# Altium PCB Cycle8 DB.pcbdoc
Units mil, origin at the board's own origin, x right, y up, seen from the top; angles counter-clockwise.
Board outline 1031.65 x 819.43 mil, 2 copper layers (Top Layer, Bottom Layer); 10 components, 10 nets, 70 pads, 34 vias.
Unrouted connection lines stored in the file: 19.
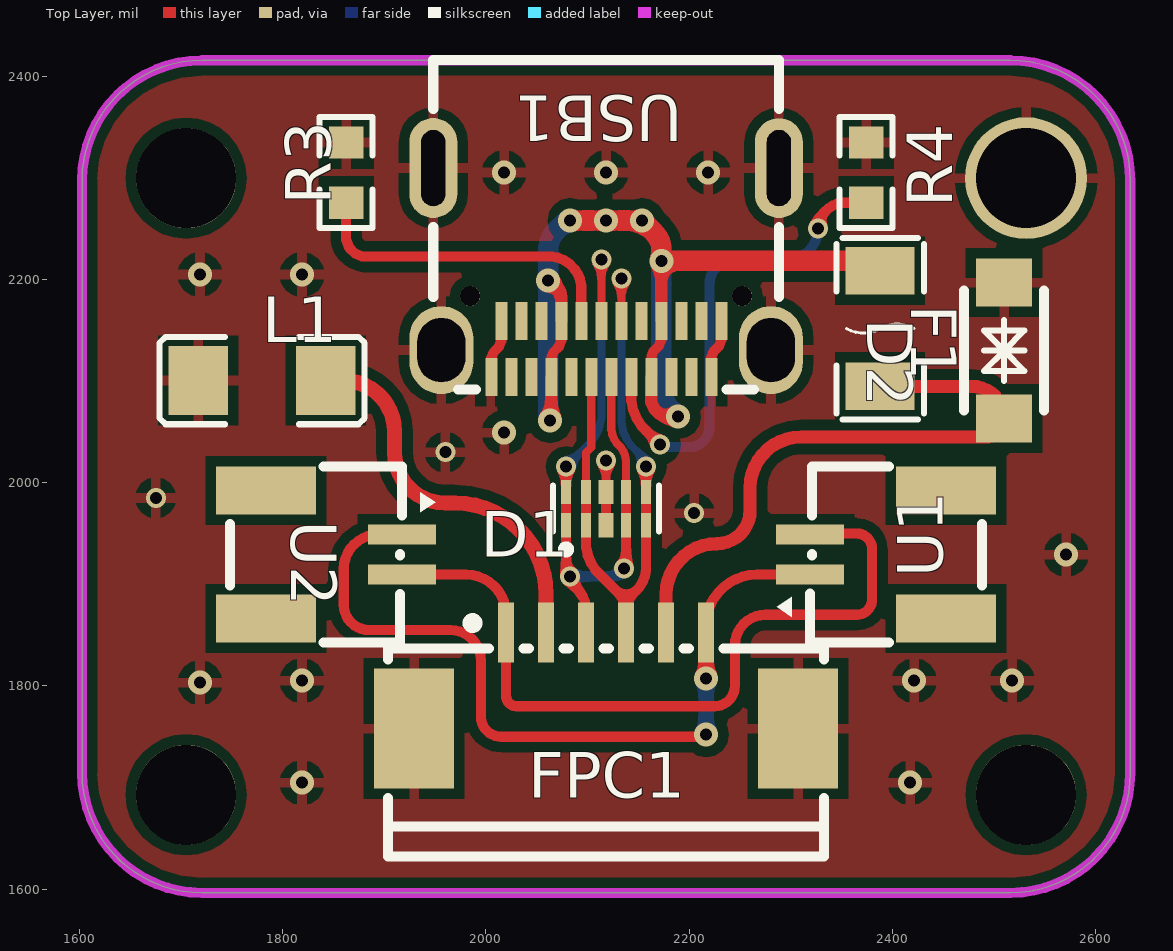
[diagram p0: Top Layer view]
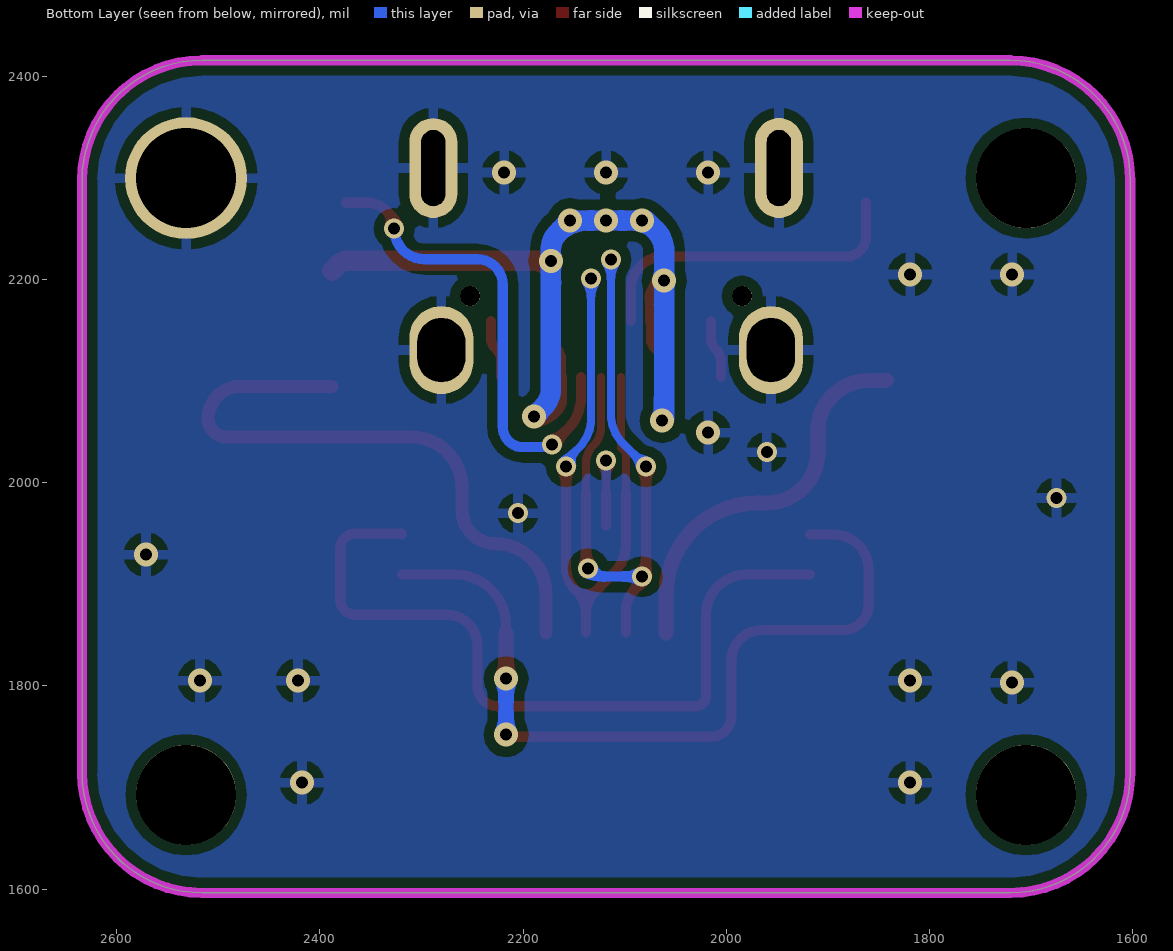
[diagram p1: Bottom Layer view, seen from below]

## Layer stack, top to bottom
Top Solder: solder mask 0.4, Solder Resist, Dk 3.5
Top Layer: signal copper 1.4
Dielectric1: dielectric 12.6, FR-4, Dk 4.8
Bottom Layer: signal copper 1.4
Bottom Solder: solder mask 0.4, Solder Resist, Dk 3.5

## Board outline
1602.44,1714.43 ccw(c1720.55,1714.43) 1720.55,1596.32 2515.98,1596.32 ccw(c2515.98,1714.43) 2634.09,1714.43 2634.09,2297.64 ccw(c2515.98,2297.64) 2515.98,2415.74 1720.55,2415.74 ccw(c1720.55,2297.64) 1602.44,2297.64

## Design rules (kind name [scope] priority, off if disabled: settings)
Clearance [All] p1: gap=10 ignorepadtopadclearanceinfootprint=FALSE except(0: Arc-Hole Track-Hole SMDPad-Hole THPad-Hole Via-Hole Fill-Hole Poly-Hole Region-Hole Text-Hole)
PolygonConnect [All] p1: connectstyle=Relief reliefconductorwidth=10 reliefentries=4 polygonreliefangle="90 Angle" airgapwidth=10
RoutingVias [All] p1: holewidth=28 width=50 viastyle="Through Hole" minholewidth=28 minwidth=50 maxholewidth=28 maxwidth=50
SolderMaskExpansion [All] p1: expansion=4 istentingtop=FALSE
Width [All] p1: maxlimit=10 minlimit=10 preferedwidth=10
30 further rules are at their usual default settings.

## Components (designator, comment, footprint, x,y, rotation, side; value= is the part's Value field where it differs from the comment)
D1 "TPD4E05U06DQAR_C138714" USON-10_L2.5-W1.0-P0.50-BL 2118.27,1974.53 r0 top
D2 "SMF9.0CA_C123799" SOD-123FL_L2.8-W1.8-LS3.7-BI 2510,2130 r270 top
F1 "ASMD1206-150" F1206 2388.02,2151.74 r270 top
FPC1 "FPC1.0-2H-WS-6P" FPC-SMD_6P-P1.00_FPC1.0-2H-WS 2118.27,1805.19 r0 top locked
L1 "60Ω" L1206 1779.6,2100.55 r0 top
R3 "5.1K" R0603 1862.36,2305.24 r90 top
R4 "5.1K" R0603 2374.17,2305.24 r90 top
U1 "WAFER-SH1.0-2PWB" CONN-SMD_2P-P1.00_XUNPU_WAFER-SH1.0-2PWB 2385.98,1929.26 r90 top
U2 "WAFER-SH1.0-2PWB" CONN-SMD_2P-P1.00_XUNPU_WAFER-SH1.0-2PWB 1850.55,1929.26 r270 top
USB1 "TYPEC-324G-BCP24" USB-C-SMD_TYPEC-324G-BCP24 2118.27,2206.87 r180 top

## Footprints (in the part's own frame and the unit in brackets; to place one, negate y for a bottom-side part, rotate by r counter-clockwise, add the part's x,y. Pads: shape width x height; smd on the part's side, far side on the other; paste and mask are expansions set on the pad)
CONN-SMD_2P-P1.00_XUNPU_WAFER-SH1.0-2PWB [mm]
  rect 0.5x1.7 smd: 1(-0.5,1.7) 2(0.5,1.7)
  rect 1.2x2.5 smd: 3(1.6,-1.7) 4(-1.6,-1.7)
  silkscreen extent -2.2,-2.6 2.2,2.54
F1206 [mil]
  rect 46.85x68.03 smd: 1(-56.89,0) 2(56.89,0)
  silkscreen extent -89,-43 89,43
FPC-SMD_6P-P1.00_FPC1.0-2H-WS [mm]
  rect 0.4x1.5 smd: 1(-2.5,1.199) 2(-1.5,1.199) 3(-0.5,1.199) 4(0.5,1.199) 5(1.5,1.199) 6(2.5,1.199)
  rect 2x3 smd: 7(4.8,-1.199) 8(-4.8,-1.199)
  silkscreen extent -5.45,-4.4 5.45,1.56
L1206 [mm]
  rect 1.485x1.728 smd: 1(-1.593,0) 2(1.593,0)
  silkscreen extent -2.56,-1.09 2.56,1.09
R0603 [mil]
  rect 31.75x34.02 smd: 1(-29.65,0) 2(29.66,0)
  silkscreen extent -55,-26 55,26
SOD-123FL_L2.8-W1.8-LS3.7-BI [mm]
  rect 1.2x1.4 smd: 1(-1.7,0) 2(1.7,0)
  silkscreen extent -1.5,-1 1.5,1
USB-C-SMD_TYPEC-324G-BCP24 [mm]
  oval 1.6x2.2 hole 1.2 slot 1.6 at 90 deg: 1(-4.12,1.937) 2(4.12,1.938)
  oval 1.2x2.5 hole 0.6 slot 1.9 at 90 deg: 3(-4.32,-2.612) 4(4.32,-2.613)
  rect 0.3x0.95 smd: A1(-2.63,2.612) A2(-2.13,2.612) A3(-1.63,2.612) A4(-1.13,2.612) A5(-0.63,2.612) A6(-0.13,2.612) A7(0.37,2.612) A8(0.87,2.612) A9(1.37,2.612) A10(1.87,2.612) A11(2.37,2.612) A12(2.87,2.612) B1(2.62,1.212) B2(2.12,1.213) B3(1.62,1.213) B4(1.12,1.213) B5(0.62,1.213) B6(0.12,1.213) B7(-0.38,1.213) B8(-0.88,1.213) B9(-1.38,1.213) B10(-1.88,1.213) B11(-2.38,1.213) B12(-2.88,1.213)
  round 0.5 hole 0.5 unplated: ""(-3.4,0.587) ""(3.4,0.587)
  silkscreen extent -4.32,-5.31 4.32,2.92
USON-10_L2.5-W1.0-P0.50-BL [mm]
  rect 0.25x0.609 smd: 1(-1,-0.415) 2(-0.5,-0.415) 4(0.5,-0.415) 5(1,-0.415) 6(1,0.415) 7(0.5,0.415) 9(-0.5,0.415) 10(-1,0.415)
  rect 0.38x0.609 smd: 3(0,-0.415) 8(0,0.414)
  silkscreen extent -1.33,-1.12 1.33,0.58

## Free pads (board coordinates)
  round 98.43 hole 98.43 unplated: ""(1704.89,1692.87) ""(1704.89,2299.74) ""(2531.65,1692.87)
  round 120 hole 98.43 unplated: ""(2531.65,2299.74)

## Via types
v1: diameter 23.62, hole 11.81, Top Layer to Bottom Layer, 22 vias
v2: diameter 19.69, hole 11.81, Top Layer to Bottom Layer, 12 vias

## Nets (pads, with @x,y where several pads share a name; then routed paths per layer and width w, separated by ;. In a path a pad name is that pad's centre, name@x,y a point inside that pad or via, vN(x,y) a via of type N, cw(c..) or ccw(c..) an arc to the next point about the centre after c; other vN are vias at no path point)
+5V: D2.2 F1.2 FPC1.5 | length 618.8
  Top Layer w13: FPC1.5 2177.32,1890 cw(c2227.32,1890) 2227.32,1940 ccw(c2227.32,1972.68) 2260,1972.68 2260,1995 cw(c2310,1995) 2310,2045 2491.93,2045 ccw(c2491.93,2063.07) D2.2 ccw(c2478.22,2063.07) 2478.22,2094.85 F1.2
B+: FPC1.6 U1.1 U2.1 | length 806
  Top Layer w10: U2.1 1893.94,1948.94 ccw(c1893.94,1915) 1860,1915 1860,1880 ccw(c1885,1880) 1885,1855 1965,1855 cw(c1965,1825) 1995,1825 1995,1770 ccw(c2015,1770) 2015,1750 2214.68,1750 ccw(c2214.68,1752.03) v1(2216.72,1752.03) ; FPC1.6 2216.72,1859.58 cw(c2266.72,1859.58) 2266.72,1909.58 U1.1
  Top Layer w15: v1(2216.72,1807.16) FPC1.6
  Bottom Layer w15: v1(2216.72,1752.03) v1(2216.72,1807.16)
B-: FPC1.1 U1.2 U2.2 | length 768
  Top Layer w10: U2.2 1980.43,1909.57 cw(c1980.43,1870.16) 2019.84,1870.16 FPC1.1 2019.84,1790.16 ccw(c2030,1790.16) 2030,1780 2225,1780 ccw(c2225,1800) 2245,1800 2245,1840 cw(c2275,1840) 2275,1870 2365,1870 ccw(c2365,1885) 2380,1885 2380,1935 ccw(c2365,1935) 2365,1950 2320.1,1950 ccw(c2320.1,1948.95) U1.2
D+: D1.1 D1.4 D1.7 D1.10 FPC1.3 USB1.A6 USB1.B6 | length 696.8
  Top Layer w8: USB1.B6 v2(2113.54,2219.58) ; USB1.A6 2123.37,2052.1 2124.32,2047.29 2126.2,2042.75 2128.93,2038.67 2132.4,2035.2 2135.13,2031.12 2137.01,2026.58 2137.97,2021.76 D1.7@2137.97,1991.85
  Top Layer w10: v2(2078.89,2015.87) 2078.9,1990.85 D1.1 2078.9,1911.51 v2(2082.83,1907.58) 2082.83,1901.67 2092.57,1891.93 2095.51,1887.53 2097.53,1882.64 2098.57,1877.45 FPC1.3 ; v2@2135.97,1915.43 2137.97,1915.43 D1.4 ; D1.4 D1.7@2137.96,1990.85
  Bottom Layer w8: v2(2078.89,2015.87) 2104.2,2041.19 2108.78,2048.04 2111.93,2055.65 2113.54,2063.72 v2(2113.54,2219.58)
  Bottom Layer w10: v2@2082.87,1907.63 2125.18,1907.63 2130.12,1909.66 v2@2135.97,1915.43
  other v2: 2135.99,1915.46
D-: D1.2 D1.5 D1.6 D1.9 FPC1.4 USB1.A7 USB1.B7 | length 711.5
  Top Layer w8: D1.9@2098.57,1991.85 2098.57,2029.63 2103.67,2034.73 USB1.A7 ; USB1.B7 v2(2133.24,2201.06)
  Top Layer w10: D1.2@2098.57,1958.73 2098.57,1936.82 2100.21,1928.57 2103.43,1920.79 2108.11,1913.79 2137.97,1883.93 ; D1.2 D1.9@2098.59,1990.85 ; 2127.36,1894.54 ccw(c2137.97,1905.15) 2148.57,1894.54 ; 2129.43,1892.47 cw(c2108.82,1871.86) 2137.97,1871.86 cw(c2167.11,1871.86) 2146.5,1892.47 ; FPC1.4 2137.97,1883.93 ; D1.5 2157.64,1990.85 v2(2157.65,2015.87) ; D1.5@2157.67,1958.23 2157.67,1914.25 2156.37,1907.75 2153.84,1901.63 2150.16,1896.12 2137.97,1883.93
  Bottom Layer w8: v2(2133.24,2201.06) 2133.24,2059.35 2134.84,2051.3 2137.98,2043.72 2142.54,2036.89 2157.65,2021.79 v2(2157.65,2015.87)
GND: D1.3 D1.8 D2.1 FPC1.7 FPC1.8 L1.1 pad.@2531.65,2299.74 R3.2 R4.2 USB1.1 USB1.2 USB1.3 USB1.4 USB1.A1 USB1.A12 USB1.B1 USB1.B12 | length 179.8
  Top Layer w8: D1.8@2118.27,1990.85 v2(2118.27,2021.78)
  Top Layer w10: USB1.A12 2005.27,2122.59 2007.84,2128.81 2012.59,2133.56 2015.17,2139.77 USB1.B1@2015.17,2159.13 ; D1.3 2118.27,1974.53 D1.8@2118.27,1990.85 ; USB1.A1 2221.77,2123.31 2224.34,2129.48 2229.09,2134.18 2231.67,2140.36 USB1.B12@2231.67,2159.13
  other v1: 1818.98,1704.77 2417.56,1704.77 1718.56,1803.22 1818.98,1805.19 2421.5,1805.19 2517.98,1805.19 2571.14,1929.24 2017.85,2049.35 1718.56,2204.9 1818.98,2204.9 2017.85,2305.32 2118.27,2305.32 2218.69,2305.32
  other v2: 2205,1970 1675,1985 1960,2030
GNDDZ: FPC1.2 L1.2 | length 383.6
  Top Layer w15: L1.2 1860,2100.55 cw(c1860,2050.55) 1910,2050.55 1910,2030 ccw(c1960,2030) 1960,1980 1969.4,1980 cw(c1969.4,1890.19) 2059.21,1890.19 FPC1.2
USB1_A5: R4.1 USB1.A5 | length 478.3
  Top Layer w10: USB1.A5 2143.07,2080.42 2144.84,2071.53 2148.3,2063.16 2153.34,2055.62 v2(2171.43,2037.53) ; v2(2326.98,2250.19) 2326.97,2257.49 2328.77,2261.83 2336.62,2269.69 2340.98,2272.6 2345.83,2274.61 2350.97,2275.63 R4.1
  Bottom Layer w10: v2(2171.43,2037.53) ccw(c2173.96,2037.53) 2173.96,2035 2200,2035 ccw(c2200,2055) 2220,2055 2220,2195 cw(c2245,2195) 2245,2220 2296.78,2220 ccw(c2296.78,2250.19) v2(2326.98,2250.19)
USB1_B5: R3.1 USB1.B5 | length 326
  Top Layer w10: R3.1 1862.36,2238.78 1865.43,2231.37 1871.11,2225.69 1878.52,2222.62 2064.76,2222.62 2070.99,2221.38 2076.87,2218.95 2082.15,2215.42 2086.65,2210.92 2090.18,2205.63 2092.62,2199.76 2093.86,2193.52 USB1.B5
VBUS: F1.1 USB1.A4 USB1.A9 USB1.B4 USB1.B9 | length 1263.6
  Top Layer w10: USB1.A9@2064.37,2104.03 2064.37,2123.03 2066.91,2129.18 2071.62,2133.89 2074.17,2140.03 USB1.B4 ; USB1.A4@2162.77,2104.03 2162.77,2123.73 2165.31,2129.88 2170.02,2134.59 2172.57,2140.74 USB1.B9
  Top Layer w12: v1(2061.17,2198.99) 2070.79,2189.37 2074.17,2181.22 USB1.B4 ; v1(2063.14,2061.16) 2064.33,2062.35 USB1.A9 ; USB1.A4@2162.77,2104.03 2162.77,2079.63 2165.52,2072.98 2170.61,2067.89 2177.26,2065.13 v1(2189.17,2065.13) ; USB1.B9 v1(2172.64,2218.4) v1(2172.64,2218.4) ; 2172.6,2197.4 cw(c2189.6,2197.4) 2189.6,2214.4
  Top Layer w20: v1(2082.83,2258.06) v1(2118.32,2258.06) v1(2153.71,2258.06) 2167.05,2244.72 2169.79,2240.62 2171.68,2236.07 2172.64,2231.23 v1(2172.64,2218.4) 2374.66,2218.4 2380.79,2215.86 F1.1 ; 2135.82,2258.06 cw(c2135.82,2214.89) 2166.35,2245.42
  Bottom Layer w20: v1(2063.14,2061.16) 2061.16,2063.13 v1(2061.17,2198.99) 2061.16,2230.79 2062.33,2236.64 2064.61,2242.14 2067.92,2247.1 2078.89,2258.06 v1(2153.71,2258.06) 2167.05,2244.72 2169.79,2240.62 2171.67,2236.07 2172.64,2231.23 v1(2172.64,2218.4) 2172.64,2090.57 2173.72,2085.12 2175.85,2079.99 2178.94,2075.36 v1(2189.17,2065.13) ; 2068.62,2247.79 cw(c2093.42,2222.99) v1@2093.42,2258.06 ; 2135.83,2258.06 cw(c2135.83,2214.89) 2166.35,2245.42
pads on no net: U1.3 U1.4 U2.3 U2.4 USB1. USB1.A2 USB1.A3 USB1.A8 USB1.A10 USB1.A11 USB1.B2 USB1.B3 USB1.B8 USB1.B10 USB1.B11

## Polygon pours and split planes (outlines as drawn)
GND on Bottom Layer "Bottom Layer-GND" (solid, remove dead copper, pour order 0): 1554.07,2444.24 1554.07,1570 2705.93,1570 2725.62,1589.69 2725.62,2458.02 2700.03,2483.62
GND on Top Layer "Top Layer-GND" (solid, remove dead copper, pour order 1): 1540,2521.27 1540,1538.73 1516.37,1515.11 2766.69,1515.11 2774.56,1507.23 2774.56,2493.7 2760.78,2507.48 2660.36,2507.48 2642.64,2525.2

## Keep-outs
Keep-Out Layer:
  lines w10: 1602.44,1848.88 1602.44,2011.21 ; 2634.09,1848.88 2634.09,2011.21 ; 1602.44,1714.43 ccw(c1720.55,1714.43) 1720.55,1596.32 2515.98,1596.32 ccw(c2515.98,1714.43) 2634.09,1714.43 2634.09,2297.64 ccw(c2515.98,2297.64) 2515.98,2415.75 1720.55,2415.74 ccw(c1720.55,2297.64) 1602.44,2297.64 1602.44,1714.43

## Other copper
Top Layer:
  region net D+: 2117.54,2199.89 2117.61,2202.35 2117.81,2204.4 2118.15,2206.13 2118.6,2207.65 2119.17,2209.04 2119.84,2210.41 2120.6,2211.84 2121.46,2213.44 2122.4,2215.29 2113.54,2224.5 2104.68,2215.29 2105.62,2213.44 2106.47,2211.84 2107.24,2210.41 2107.91,2209.04 2108.47,2207.65 2108.93,2206.13 2109.26,2204.4 2109.47,2202.35 2109.54,2199.89
  region net D+: 2083.9,1996.19 2083.94,1998.62 2084.07,2000.68 2084.28,2002.45 2084.6,2004.01 2085.01,2005.44 2085.53,2006.84 2086.15,2008.27 2086.89,2009.83 2087.75,2011.6 2078.88,2020.8 2070.03,2011.58 2070.89,2009.82 2071.63,2008.26 2072.26,2006.83 2072.78,2005.43 2073.19,2004 2073.51,2002.44 2073.73,2000.68 2073.85,1998.62 2073.9,1996.19
  region net D+: 2132.97,1934.94 2132.92,1932.74 2132.76,1930.87 2132.49,1929.27 2132.11,1927.86 2131.6,1926.58 2130.96,1925.37 2130.18,1924.15 2129.25,1922.86 2128.17,1921.44 2135,1910.64 2145.53,1917.88 2144.99,1919.94 2144.52,1921.73 2144.11,1923.35 2143.76,1924.9 2143.48,1926.47 2143.25,1928.17 2143.09,1930.08 2143,1932.31 2142.97,1934.94
  region net D+: 2073.9,1926.45 2073.88,1923.62 2073.82,1921.24 2073.73,1919.19 2073.62,1917.37 2073.49,1915.67 2073.36,1913.99 2073.22,1912.22 2073.1,1910.25 2072.99,1907.98 2084.79,1903.07 2089.24,1915.05 2088.05,1916.1 2087.03,1917.08 2086.16,1918.06 2085.44,1919.08 2084.87,1920.18 2084.43,1921.42 2084.13,1922.85 2083.95,1924.51 2083.9,1926.45
  region net D+: 2097.17,1894.05 2096.02,1895.76 2095.04,1897.25 2094.22,1898.58 2093.57,1899.81 2093.07,1900.99 2092.73,1902.2 2092.54,1903.49 2092.5,1904.92 2092.61,1906.56 2081.15,1912.21 2075.95,1900.54 2077.56,1899.07 2079.05,1897.88 2080.45,1896.86 2081.79,1895.91 2083.11,1894.92 2084.45,1893.78 2085.83,1892.4 2087.29,1890.67 2088.85,1888.49
  region net D-: 2137.23,2181.38 2137.3,2183.83 2137.5,2185.88 2137.84,2187.61 2138.29,2189.13 2138.86,2190.52 2139.53,2191.89 2140.3,2193.32 2141.15,2194.91 2142.09,2196.76 2133.24,2205.98 2124.38,2196.78 2125.31,2194.93 2126.16,2193.33 2126.93,2191.89 2127.6,2190.53 2128.16,2189.13 2128.62,2187.62 2128.95,2185.88 2129.16,2183.83 2129.23,2181.38
  region net D-: 2162.64,1996.19 2162.68,1998.62 2162.81,2000.68 2163.02,2002.44 2163.34,2004 2163.75,2005.43 2164.27,2006.83 2164.9,2008.26 2165.64,2009.82 2166.5,2011.58 2157.65,2020.8 2148.78,2011.6 2149.64,2009.83 2150.38,2008.27 2151.01,2006.84 2151.52,2005.44 2151.93,2004.01 2152.25,2002.45 2152.47,2000.68 2152.59,1998.62 2152.64,1996.19
  region net GND: 2122.27,2002.1 2122.34,2004.55 2122.54,2006.6 2122.88,2008.34 2123.33,2009.85 2123.89,2011.25 2124.57,2012.61 2125.33,2014.05 2126.19,2015.64 2127.12,2017.49 2118.27,2026.71 2109.41,2017.49 2110.34,2015.64 2111.2,2014.05 2111.97,2012.61 2112.64,2011.25 2113.2,2009.85 2113.66,2008.34 2113.99,2006.6 2114.2,2004.55 2114.27,2002.1
  region net B+: 2209.22,1830.79 2209.21,1827.89 2209.16,1825.38 2209.06,1823.19 2208.89,1821.24 2208.61,1819.45 2208.22,1817.74 2207.68,1816.03 2206.97,1814.25 2206.09,1812.31 2216.72,1801.26 2227.35,1812.31 2226.46,1814.25 2225.76,1816.03 2225.22,1817.74 2224.82,1819.45 2224.55,1821.24 2224.37,1823.19 2224.27,1825.38 2224.23,1827.89 2224.22,1830.79
  region net VBUS: 2080.17,2180.03 2080,2183.7 2079.54,2186.74 2078.83,2189.3 2077.93,2191.53 2076.89,2193.58 2075.76,2195.59 2074.59,2197.72 2073.42,2200.09 2072.32,2202.87 2056.99,2203.17 2057.29,2187.84 2058.99,2187.33 2060.69,2186.92 2062.35,2186.52 2063.9,2186.07 2065.29,2185.47 2066.47,2184.64 2067.37,2183.51 2067.96,2182 2068.17,2180.03
  region net VBUS: 2160.96,2235.84 2161.93,2234.13 2162.58,2232.44 2162.96,2230.8 2163.11,2229.24 2163.08,2227.78 2162.91,2226.45 2162.65,2225.29 2162.33,2224.31 2162.01,2223.55 2172.64,2212.49 2183.27,2223.55 2182.81,2225.01 2182.59,2226.87 2182.47,2229.07 2182.35,2231.56 2182.11,2234.31 2181.63,2237.27 2180.79,2240.39 2179.49,2243.64 2177.59,2246.95
  region net VBUS: 2196.26,2228.4 2193.29,2228.37 2190.53,2228.32 2188.01,2228.25 2185.7,2228.2 2183.64,2228.19 2181.81,2228.24 2180.22,2228.38 2178.88,2228.64 2177.79,2229.03 2166.73,2218.4 2177.79,2207.77 2178.88,2208.16 2180.22,2208.41 2181.81,2208.55 2183.64,2208.61 2185.7,2208.6 2188.01,2208.55 2190.53,2208.48 2193.29,2208.42 2196.26,2208.4
  region net VBUS: 2178.6,2194.78 2178.65,2197.69 2178.8,2200.15 2179.06,2202.27 2179.44,2204.14 2179.94,2205.86 2180.57,2207.52 2181.32,2209.24 2182.22,2211.1 2183.25,2213.21 2172.66,2224.3 2161.99,2213.29 2163.01,2211.16 2163.9,2209.29 2164.65,2207.56 2165.26,2205.89 2165.76,2204.17 2166.13,2202.29 2166.39,2200.17 2166.55,2197.7 2166.6,2194.78
  region net VBUS: 2163.17,2066.84 2165.86,2064.3 2168.26,2062.32 2170.45,2060.77 2172.53,2059.56 2174.57,2058.56 2176.66,2057.67 2178.87,2056.77 2181.3,2055.75 2184.02,2054.5 2195.07,2065.13 2184.02,2075.76 2182.57,2075.04 2181.17,2074.34 2179.81,2073.72 2178.48,2073.26 2177.15,2073 2175.82,2073.02 2174.47,2073.37 2173.09,2074.12 2171.66,2075.33
  region net VBUS: 2058.33,2084.73 2058.27,2081.95 2058.1,2079.59 2057.81,2077.56 2057.39,2075.78 2056.83,2074.15 2056.12,2072.58 2055.27,2070.99 2054.26,2069.28 2053.08,2067.36 2062.54,2055.29 2074.23,2065.21 2073.38,2067.52 2072.64,2069.53 2072.01,2071.37 2071.48,2073.14 2071.06,2074.95 2070.73,2076.9 2070.51,2079.11 2070.37,2081.68 2070.33,2084.73
  region net VBUS: 2106.45,2268.07 2103.47,2268.04 2100.72,2267.98 2098.19,2267.92 2095.89,2267.87 2093.82,2267.86 2091.99,2267.91 2090.41,2268.05 2089.06,2268.3 2087.97,2268.7 2087.97,2268.69 2076.92,2258.07 2087.97,2247.44 2089.06,2247.83 2090.41,2248.08 2091.99,2248.22 2093.82,2248.27 2095.89,2248.26 2098.19,2248.21 2100.72,2248.15 2103.47,2248.09 2106.45,2248.07
  region net VBUS: 2178.01,2246.33 2176.1,2248.99 2174.2,2251.33 2172.34,2253.4 2170.58,2255.23 2168.96,2256.84 2167.53,2258.29 2166.34,2259.6 2165.44,2260.8 2164.86,2261.94 2149.53,2262.24 2149.83,2246.91 2150.79,2246.49 2151.85,2245.84 2153.01,2244.98 2154.25,2243.89 2155.57,2242.59 2156.95,2241.07 2158.39,2239.34 2159.87,2237.38 2161.38,2235.22
  region net VBUS: 2130.09,2248.07 2133.06,2248.09 2135.81,2248.15 2138.34,2248.21 2140.64,2248.26 2142.71,2248.27 2144.54,2248.22 2146.13,2248.08 2147.47,2247.83 2148.56,2247.43 2148.56,2247.44 2159.61,2258.07 2148.56,2268.69 2147.47,2268.3 2146.13,2268.05 2144.54,2267.91 2142.71,2267.86 2140.64,2267.87 2138.34,2267.92 2135.81,2267.98 2133.06,2268.04 2130.09,2268.07
  region net VBUS: 2141.94,2268.07 2138.97,2268.04 2136.22,2267.98 2133.69,2267.92 2131.39,2267.87 2129.32,2267.86 2127.49,2267.91 2125.9,2268.05 2124.56,2268.3 2123.47,2268.7 2123.47,2268.69 2112.41,2258.07 2123.47,2247.44 2124.56,2247.83 2125.9,2248.08 2127.49,2248.22 2129.32,2248.27 2131.39,2248.26 2133.69,2248.21 2136.22,2248.15 2138.97,2248.09 2141.94,2248.07
  region net VBUS: 2094.7,2248.07 2097.67,2248.09 2100.42,2248.15 2102.95,2248.21 2105.25,2248.26 2107.32,2248.27 2109.15,2248.22 2110.74,2248.08 2112.08,2247.83 2113.17,2247.43 2113.17,2247.44 2124.22,2258.07 2113.17,2268.69 2112.08,2268.3 2110.74,2268.05 2109.15,2267.91 2107.32,2267.86 2105.25,2267.87 2102.95,2267.92 2100.42,2267.98 2097.67,2268.04 2094.7,2268.07
  region net USB1_A5: 2153.97,2047.92 2155.66,2046.17 2157.02,2044.62 2158.12,2043.22 2159,2041.9 2159.72,2040.59 2160.34,2039.24 2160.91,2037.78 2161.49,2036.16 2162.13,2034.3 2174.91,2034.06 2174.66,2046.84 2172.8,2047.48 2171.17,2048.05 2169.72,2048.62 2168.37,2049.24 2167.06,2049.96 2165.74,2050.84 2164.33,2051.94 2162.79,2053.3 2161.04,2054.99
  region net USB1_A5: 2330.77,2270.91 2328.65,2268.76 2326.9,2266.91 2325.44,2265.27 2324.19,2263.76 2323.09,2262.3 2322.05,2260.82 2321.01,2259.22 2319.89,2257.44 2318.61,2255.37 2326.47,2245.29 2336.24,2253.54 2335.8,2254.8 2335.44,2255.99 2335.2,2257.13 2335.11,2258.23 2335.19,2259.31 2335.47,2260.4 2335.99,2261.5 2336.77,2262.64 2337.84,2263.84
Bottom Layer:
  region net D+: 2117.54,2199.89 2117.61,2202.35 2117.81,2204.4 2118.15,2206.13 2118.6,2207.65 2119.17,2209.04 2119.84,2210.41 2120.6,2211.84 2121.46,2213.44 2122.4,2215.29 2113.54,2224.5 2104.68,2215.29 2105.62,2213.44 2106.47,2211.84 2107.24,2210.41 2107.91,2209.04 2108.47,2207.65 2108.93,2206.13 2109.26,2204.4 2109.47,2202.35 2109.54,2199.89
  region net D+: 2089.98,2032.62 2088.2,2030.94 2086.6,2029.64 2085.14,2028.65 2083.75,2027.89 2082.36,2027.31 2080.92,2026.82 2079.37,2026.35 2077.63,2025.82 2075.66,2025.18 2075.41,2012.4 2088.18,2012.64 2088.83,2014.62 2089.36,2016.35 2089.83,2017.91 2090.32,2019.35 2090.91,2020.73 2091.66,2022.13 2092.65,2023.59 2093.95,2025.18 2095.64,2026.97
  region net D+: 2118.98,1902.63 2122.01,1902.68 2124.57,1902.82 2126.76,1903.04 2128.71,1903.34 2130.51,1903.72 2132.28,1904.18 2134.14,1904.71 2136.19,1905.3 2138.54,1905.95 2139.71,1918.68 2126.94,1919.35 2126.41,1918.11 2125.88,1916.96 2125.31,1915.91 2124.66,1914.98 2123.9,1914.18 2122.99,1913.53 2121.89,1913.04 2120.57,1912.74 2118.98,1912.63
  region net D+: 2102.51,1912.63 2100.07,1912.67 2098.01,1912.8 2096.24,1913.02 2094.68,1913.33 2093.24,1913.74 2091.85,1914.26 2090.41,1914.88 2088.84,1915.61 2087.07,1916.46 2077.9,1907.56 2087.16,1898.75 2088.92,1899.61 2090.47,1900.36 2091.9,1900.99 2093.28,1901.51 2094.72,1901.93 2096.27,1902.24 2098.03,1902.46 2100.09,1902.59 2102.51,1902.63
  region net D-: 2137.24,2181.38 2137.31,2183.83 2137.51,2185.88 2137.85,2187.61 2138.3,2189.13 2138.87,2190.52 2139.54,2191.89 2140.3,2193.32 2141.16,2194.92 2142.1,2196.77 2133.24,2205.98 2124.38,2196.77 2125.32,2194.92 2126.17,2193.32 2126.94,2191.89 2127.61,2190.52 2128.17,2189.13 2128.63,2187.61 2128.96,2185.88 2129.17,2183.83 2129.24,2181.38
  region net D-: 2144.51,2029.27 2145.84,2027.82 2146.82,2026.49 2147.51,2025.22 2147.95,2023.99 2148.18,2022.74 2148.24,2021.45 2148.18,2020.07 2148.04,2018.57 2147.86,2016.9 2159.32,2011.25 2164.52,2022.93 2162.78,2024.55 2161.22,2025.87 2159.79,2026.98 2158.42,2027.99 2157.04,2028.99 2155.59,2030.08 2154,2031.37 2152.22,2032.95 2150.17,2034.92
  region net B+: 2209.22,1775.65 2209.21,1772.76 2209.16,1770.25 2209.06,1768.06 2208.89,1766.11 2208.61,1764.32 2208.22,1762.61 2207.68,1760.9 2206.97,1759.12 2206.09,1757.18 2216.72,1746.13 2227.35,1757.18 2226.46,1759.12 2225.76,1760.9 2225.22,1762.61 2224.82,1764.32 2224.55,1766.11 2224.37,1768.06 2224.27,1770.25 2224.23,1772.76 2224.22,1775.65
  region net B+: 2224.22,1783.54 2224.23,1786.44 2224.27,1788.95 2224.37,1791.13 2224.55,1793.09 2224.82,1794.88 2225.22,1796.59 2225.76,1798.3 2226.46,1800.08 2227.35,1802.02 2216.72,1813.07 2206.09,1802.02 2206.97,1800.08 2207.68,1798.3 2208.22,1796.59 2208.61,1794.88 2208.89,1793.09 2209.06,1791.13 2209.16,1788.95 2209.21,1786.44 2209.22,1783.54
  region net VBUS: 2071.16,2175.37 2071.14,2178.34 2071.08,2181.1 2071.02,2183.63 2070.97,2185.93 2070.96,2187.99 2071.01,2189.82 2071.15,2191.41 2071.4,2192.76 2071.8,2193.85 2071.79,2193.85 2061.16,2204.9 2050.53,2193.85 2050.93,2192.76 2051.18,2191.41 2051.32,2189.82 2051.37,2187.99 2051.36,2185.93 2051.31,2183.63 2051.25,2181.1 2051.19,2178.34 2051.16,2175.37
  region net VBUS: 2051.16,2222.62 2051.19,2219.64 2051.25,2216.89 2051.31,2214.36 2051.36,2212.06 2051.37,2209.99 2051.32,2208.16 2051.18,2206.58 2050.93,2205.23 2050.53,2204.14 2061.17,2193.09 2071.79,2204.14 2071.4,2205.24 2071.15,2206.58 2071.01,2208.16 2070.95,2209.99 2070.97,2212.06 2071.02,2214.36 2071.08,2216.89 2071.14,2219.64 2071.16,2222.62
  region net VBUS: 2160.96,2235.84 2161.93,2234.13 2162.58,2232.44 2162.96,2230.8 2163.11,2229.24 2163.08,2227.78 2162.91,2226.45 2162.65,2225.28 2162.33,2224.31 2162.01,2223.55 2172.64,2212.49 2183.27,2223.55 2182.81,2225.01 2182.59,2226.87 2182.47,2229.07 2182.35,2231.56 2182.11,2234.31 2181.63,2237.27 2180.79,2240.39 2179.48,2243.64 2177.59,2246.95
  region net VBUS: 2182.64,2194.78 2182.61,2197.75 2182.55,2200.5 2182.49,2203.03 2182.44,2205.33 2182.43,2207.4 2182.48,2209.23 2182.62,2210.82 2182.88,2212.16 2183.27,2213.25 2172.64,2224.3 2162.01,2213.25 2162.4,2212.16 2162.65,2210.82 2162.79,2209.23 2162.85,2207.4 2162.84,2205.33 2162.78,2203.03 2162.72,2200.5 2162.66,2197.75 2162.64,2194.78
  region net VBUS: 2165.23,2079.48 2166.75,2076.27 2168.42,2073.46 2170.16,2071 2171.89,2068.85 2173.56,2066.98 2175.08,2065.32 2176.38,2063.85 2177.38,2062.51 2178.01,2061.26 2193.34,2060.96 2193.04,2076.29 2192.19,2076.66 2191.23,2077.23 2190.19,2078 2189.09,2078.97 2187.95,2080.16 2186.82,2081.57 2185.72,2083.19 2184.67,2085.05 2183.71,2087.13
  region net VBUS: 2051.16,2084.62 2051.22,2081.39 2051.36,2078.4 2051.55,2075.66 2051.75,2073.18 2051.94,2070.94 2052.07,2068.95 2052.11,2067.21 2052.03,2065.72 2051.8,2064.47 2064.12,2055.34 2072.76,2068.01 2072.26,2068.93 2071.88,2070.1 2071.6,2071.52 2071.4,2073.17 2071.28,2075.04 2071.2,2077.13 2071.17,2079.43 2071.16,2081.93 2071.16,2084.62
  region net VBUS: 2073.46,2237.39 2074.75,2239.2 2076.05,2240.8 2077.35,2242.2 2078.63,2243.39 2079.86,2244.38 2081.03,2245.17 2082.11,2245.75 2083.1,2246.13 2083.96,2246.31 2087.87,2261.14 2072.89,2264.46 2071.99,2263.35 2070.73,2262.2 2069.18,2260.94 2067.39,2259.54 2065.42,2257.94 2063.32,2256.09 2061.15,2253.93 2058.97,2251.42 2056.83,2248.5
  region net VBUS: 2106.45,2268.06 2103.47,2268.04 2100.72,2267.98 2098.19,2267.92 2095.89,2267.87 2093.82,2267.86 2091.99,2267.91 2090.41,2268.05 2089.06,2268.3 2087.97,2268.69 2076.92,2258.07 2087.97,2247.43 2089.06,2247.82 2090.41,2248.08 2091.99,2248.22 2093.82,2248.27 2095.89,2248.26 2098.19,2248.21 2100.72,2248.15 2103.47,2248.09 2106.45,2248.06
  region net VBUS: 2130.09,2248.06 2133.06,2248.09 2135.81,2248.15 2138.34,2248.21 2140.64,2248.26 2142.71,2248.27 2144.54,2248.22 2146.13,2248.08 2147.47,2247.82 2148.56,2247.43 2159.61,2258.07 2148.56,2268.69 2147.47,2268.3 2146.13,2268.05 2144.54,2267.91 2142.71,2267.86 2140.64,2267.87 2138.34,2267.92 2135.81,2267.98 2133.06,2268.04 2130.09,2268.06
  region net VBUS: 2178.01,2246.33 2176.1,2248.99 2174.2,2251.33 2172.34,2253.4 2170.58,2255.22 2168.96,2256.84 2167.53,2258.29 2166.34,2259.59 2165.44,2260.8 2164.86,2261.94 2149.53,2262.24 2149.83,2246.91 2150.79,2246.49 2151.85,2245.84 2153.01,2244.98 2154.25,2243.89 2155.57,2242.59 2156.95,2241.07 2158.39,2239.34 2159.87,2237.38 2161.38,2235.21